# EAGLE board prototype01 (EAGLE 7.5.0)

Size 72 x 47 mm. Coordinates in mm from the lower left corner, seen from the top.
Outline: 0,0 72,0 72,47 0,47 0,0
Copper layers (1*16): Top 0.035mm / dielectric 1.5mm / Bottom 0.035mm
Design rules "default": minimum track width 10mil, minimum drill 24mil, track to track 8mil, track to pad 8mil, pad to pad 8mil, via to via 8mil, smd to smd 8mil, copper to edge 40mil, drill to drill 8mil, minimum pad ring 10mil, minimum via ring 8mil, stop-mask expansion 4mil, vias tented up to drill 0mil, thermal gap 10mil

## Footprints (pad centres in the part's own frame; a part is rotated, then mirrored left to right if it is on the bottom)
CAP_200MIL = drill 0.8 pad 1.4 long: 1 -2.54,0; 2 2.54,0
HEADER_6PIN = drill 1 pad 1.6 long: 1 0,0; 2 2.54,0; 3 5.08,0; 4 7.62,0; 5 10.16,0; 6 12.7,0
HEADER_L_2PIN = drill 1 pad 1.6 long: 1 1.27,-1.27; 2 -1.27,-1.27
3,2 = hole 3.2: 0,0
RESISTOR_0207_300MIL = drill 0.8 pad 1.4 long: 1 0,0; 2 7.62,0
B3F-10XX = drill 1.016 long: 1 0,0; 2 5.08,0; 3 0,-7.62; 4 5.08,-7.62
TO92-LINE = drill 0.8 pad 1.4 long: 1 0,0; 2 2.54,0; 3 5.08,0
DIL40 = drill 0.813 long: 1 -24.13,-7.62; 2 -21.59,-7.62; 3 -19.05,-7.62; 4 -16.51,-7.62; 5 -13.97,-7.62; 6 -11.43,-7.62; 7 -8.89,-7.62; 8 -6.35,-7.62; 9 -3.81,-7.62; 10 -1.27,-7.62; 11 1.27,-7.62; 12 3.81,-7.62; 13 6.35,-7.62; 14 8.89,-7.62; 15 11.43,-7.62; 16 13.97,-7.62; 17 16.51,-7.62; 18 19.05,-7.62; 19 21.59,-7.62; 20 24.13,-7.62; 21 24.13,7.62; 22 21.59,7.62; 23 19.05,7.62; 24 16.51,7.62; 25 13.97,7.62; 26 11.43,7.62; 27 8.89,7.62; 28 6.35,7.62; 29 3.81,7.62; 30 1.27,7.62; 31 -1.27,7.62; 32 -3.81,7.62; 33 -6.35,7.62; 34 -8.89,7.62; 35 -11.43,7.62; 36 -13.97,7.62; 37 -16.51,7.62; 38 -19.05,7.62; 39 -21.59,7.62; 40 -24.13,7.62
AE-AQM1602A = drill 1 pad 1.6 long: 1 0,0; 2 2.54,0; 3 5.08,0; 4 7.62,0
HC-49/S = drill 0.7: 1 -2.4,0; 2 2.4,0

## Placement (x,y rotation side)
C1  1uF  [CAP_200MIL]  13.97,38.1 270 top
C2  1uF  [CAP_200MIL]  26.67,38.1 270 top
C3  22pF  [CAP_200MIL]  43.18,3.81 180 top
C4  22pF  [CAP_200MIL]  53.34,3.81 0 top
C5  0.1uF  [CAP_200MIL]  38.1,11.43 180 top
C6  0.1uF  [CAP_200MIL]  35.56,36.83 180 top
CN1  PIC_CN_H  [HEADER_6PIN]  7.62,25.4 90 top
CN2  12V_IN  [HEADER_L_2PIN]  19.05,8.89 180 top
CN3  ADC_IN  [HEADER_L_2PIN]  26.67,8.89 180 top
H1  MOUNT_HOLE_3.2  [3,2]  3,44 0 top
H2  MOUNT_HOLE_3.2  [3,2]  3,3 0 top
H3  MOUNT_HOLE_3.2  [3,2]  69,3 0 top
H4  MOUNT_HOLE_3.2  [3,2]  69,44 0 top
R15  10k  [RESISTOR_0207_300MIL]  3.81,20.32 0 top
SW1  10-XX  [B3F-10XX]  11.43,15.24 270 top
U1  XC6202P502TB  [TO92-LINE]  17.78,40.64 0 top
U2  PIC16F18877-I/P  [DIL40]  41.91,24.13 0 top
U3  AE-AQM1602A  [AE-AQM1602A]  58.42,11.43 0 top
X1  20MHz  [HC-49/S]  48.26,10.16 0 top

## Library data of the parts
C1-C6 R15 SW1 U1 U2 X1 = Parts
CN1-CN3 = Connectors
H1-H4 = Generic
U3 = PartsForProto

## Nets
0V: C1.2 C2.2 C3.2 C4.2 C5.2 C6.2 CN1.3 CN2.2 CN3.2 SW1.3 SW1.4 U1.2 U2.12 U2.31 U3.1
+5V: C1.1 C5.1 C6.1 CN1.2 R15.2 U1.1 U2.11 U2.32 U3.4
+12V: C2.1 CN2.1 U1.3
ANA0: CN3.1 U2.2
N$1: U2.18 U3.3
N$2: CN1.4 U2.40
N$3: CN1.1 R15.1 SW1.1 SW1.2 U2.1
N$4: CN1.5 U2.39
N$5: U2.23 U3.2
OSC1: C3.1 U2.13 X1.1
OSC2: C4.1 U2.14 X1.2

## Tracks (layer width: path | path; a pad name or v marks a point on that pad's centre or on a via)
0V  (14 unrouted)
+5V  (8 unrouted)
+12V  (2 unrouted)
ANA0  (1 unrouted)
N$1  (1 unrouted)
N$2  (1 unrouted)
N$3  (4 unrouted)
N$4  (1 unrouted)
N$5  (1 unrouted)
OSC1  (2 unrouted)
OSC2  (2 unrouted)